# Altium PCB BluetoothModule.PcbDoc
Units mm, origin at the board's own origin, x right, y up, seen from the top; angles counter-clockwise.
Board outline 22 x 15 mm, 2 copper layers (Top Layer, Bottom Layer); 11 components, 11 nets, 67 pads, 11 vias.
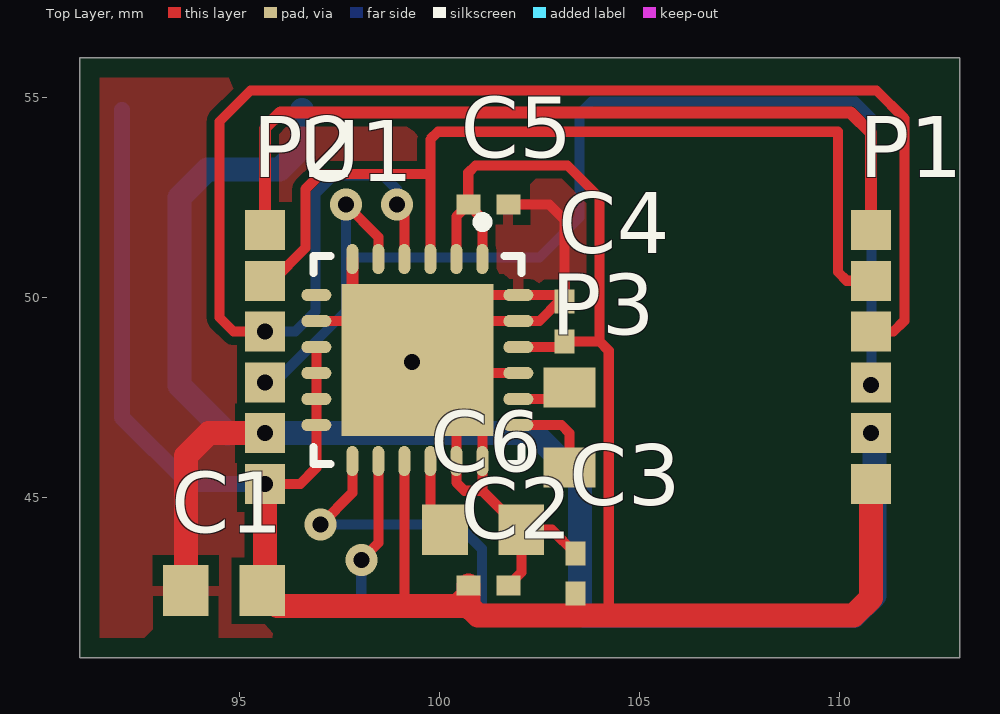
[diagram p0: Top Layer view]
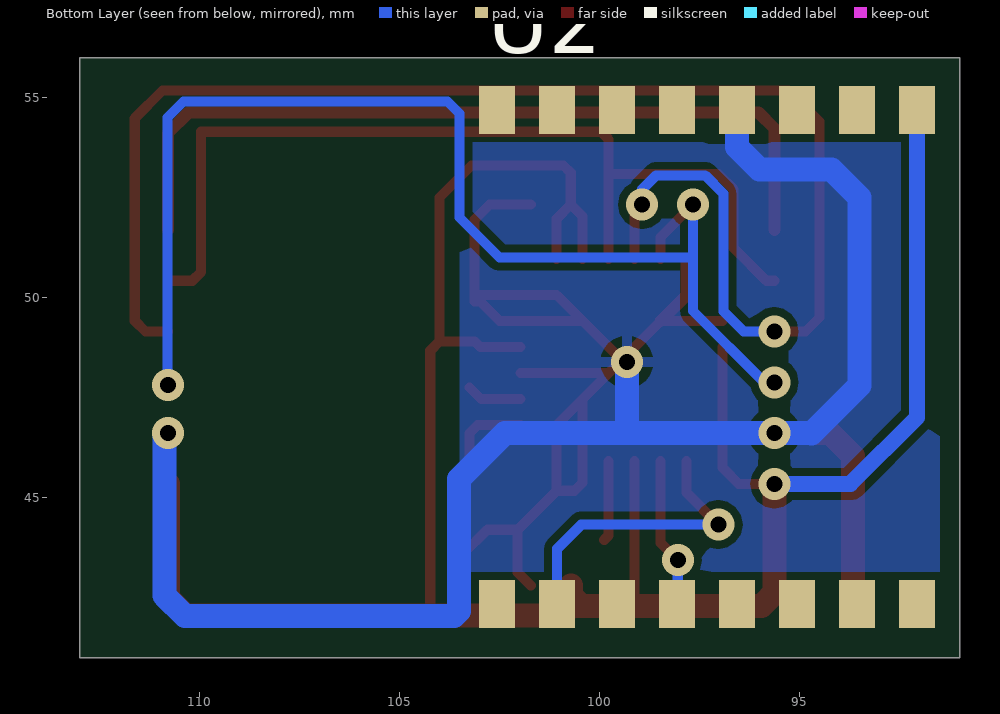
[diagram p1: Bottom Layer view, seen from below]

## Layer stack, top to bottom
Top Layer: signal copper 0.0356
Dielectric: dielectric 0.32, FR-4, Dk 4.8
Bottom Layer: signal copper 0.0356

## Board outline
91,56 112,56 113,56 113,41 91,41

## Design rules (kind name [scope] priority, off if disabled: settings)
Clearance [All] p1: gap=0.203
HoleToHoleClearance [All] p1: gap=0.203 allowstackedmicrovias=TRUE
MinimumSolderMaskSliver [All] p1: minsoldermaskwidth=0
PlaneClearance [All] p1: clearance=1
PlaneConnect [All] p1: planeconnectstyle=Direct reliefexpansion=0.508 reliefentries=4 reliefconductorwidth=0.254 reliefairgap=0.254
PolygonConnect [All] p1: connectstyle=Relief reliefconductorwidth=0.254 reliefentries=4 polygonreliefangle="90 Angle" airgapwidth=0.254
RoutingVias [All] p1: holewidth=0.4 width=0.8 viastyle="Through Hole" minholewidth=0.3 minwidth=0.6 maxholewidth=1 maxwidth=2
SilkToSilkClearance [All] p1: silktosilkclearance=0
SilkToSolderMaskClearance [IsPad] p1: minsilkscreentomaskgap=0 clearancetoexposedcopper=TRUE
SolderMaskExpansion [All] p1: expansion=0.051
Width [All] p1: maxlimit=2 minlimit=0.203 preferedwidth=0.3
22 further rules are at their usual default settings.

## Components (designator, comment, footprint, x,y, rotation, side; value= is the part's Value field where it differs from the comment)
C1 "10u" 0805 94.615,42.672 r0 top
C2 "Cap Semi" 0402 101.219,42.799 r180 top
C3 "Cap Semi" 0402 103.4,43.1 r270 top
C4 "Cap Semi" 0402 103.124,49.403 r270 top
C5 "Cap Semi" 0402 101.219,52.324 r180 top
C6 "10u" 0805 101.092,44.196 r180 top
P1 "OutputConn" Goldpin6_1.27mm 110.791,49.149 r0 top
P2 "InputConn" Goldpin6_1.27mm 95.631,49.149 r0 top
P3 "Programming" GeckoProgramming 103.251,47.752 r270 top
U1 "EFM32ZG110" QFN24_5x5_0.65 99.441,48.387 r270 top
U2 "HM-11" HM-11 97.409,48.614 r0 bottom

## Footprints (in the part's own frame and the unit in brackets; to place one, negate y for a bottom-side part, rotate by r counter-clockwise, add the part's x,y. Pads: shape width x height; smd on the part's side, far side on the other; paste and mask are expansions set on the pad)
0402 [mm] "Chip Capacitor, Body 1.0x0.5mm, IPC High Density"
  rect 0.6x0.5 smd: 1(-0.5,0) 2(0.5,0)
  body extent -0.55,-0.3 0.55,0.3, height 1.3
0805 [mm]
  rect 1.14x1.27 smd: 1(-0.955,0) 2(0.955,0)
GeckoProgramming [mm]
  rect 1x1.3 smd: 1(0,0) 2(2,0)
Goldpin6_1.27mm [mm]
  rect 1x1 smd: 1(0,-3.81) 2(0,-2.54) 3(0,-1.27) 4(0,0) 5(0,1.27) 6(0,2.54)
HM-11 [mm]
  rect 0.9x1.2 smd: 1(5.15,6.275) 2(3.65,6.275) 3(2.15,6.275) 4(0.65,6.275) 5(-0.85,6.275) 6(-2.35,6.275) 7(-3.85,6.275) 8(-5.35,6.275) 9(-5.35,-6.075) 10(-3.85,-6.075) 11(-2.35,-6.075) 12(-0.85,-6.075) 13(0.65,-6.075) 14(2.15,-6.075) 15(3.65,-6.075) 16(5.15,-6.075)
QFN24_5x5_0.65 [mm]
  oval 0.75x0.3 smd: 1(-2.575,1.631) 2(-2.575,0.981) 3(-2.575,0.331) 4(-2.575,-0.319) 5(-2.575,-0.969) 6(-2.575,-1.619) 13(2.475,-1.619) 14(2.475,-0.969) 15(2.475,-0.319) 16(2.475,0.331) 17(2.475,0.981) 18(2.475,1.631)
  oval 0.3x0.75 smd: 7(-1.675,-2.519) 8(-1.025,-2.519) 9(-0.375,-2.519) 10(0.275,-2.519) 11(0.925,-2.519) 12(1.575,-2.519) 19(1.575,2.531) 20(0.925,2.531) 21(0.275,2.531) 22(-0.375,2.531) 23(-1.025,2.531) 24(-1.675,2.531)
  rect 3.8x3.8 smd: 25(-0.05,0.006)
  silkscreen extent -3.62,-2.59 2.55,2.61, body extent -2.63,-2.57 2.53,2.58, height 1

## Part data
C1 C6: library part "Cap Semi", "Capacitor (Semiconductor SIM Model)"
C2 C3 C4 C5: "Capacitor (Semiconductor SIM Model)"
P1 P2: library part MHDR1X6, "Header, 6-Pin"
P3: library part MHDR1X2, "Header, 2-Pin"

## Via types
v1: diameter 0.8, hole 0.4, Top Layer to Bottom Layer, 11 vias

## Nets (pads, with @x,y where several pads share a name; then routed paths per layer and width w, separated by ;. In a path a pad name is that pad's centre, name@x,y a point inside that pad or via, vN(x,y) a via of type N, cw(c..) or ccw(c..) an arc to the next point about the centre after c; other vN are vias at no path point)
+5V: P1.6 P2.6 | length 20.5
  Top Layer w0.3: P2.6 95.631,54.231 96.025,54.625 110.275,54.625 110.791,54.109 P1.6
GND: C1.1 C2.1 C3.1 C4.1 C5.1 C6.1 P1.2 P2.2 U1.6 U1.8 U1.17 U1.18 U1.21 U1.23 U1.24 U1.25 U2.12 | length 71.8
  Top Layer w0.254: U1.8 98.472,49.412 U1.25 ; C2.1 102.047,43.127 C6.1 ; C5.1 102.743,52.324 103.124,51.943 C4.1 ; U1.21 U1.25@99.772,48.112 ; C3.1 102.804,44.196 C6.1 ; U1.25 U1.25@100.422,49.412 ; U1.25 U1.25@99.772,48.112 ; U1.25@99.772,48.112 U1.25@100.422,47.462 ; U1.25@100.422,47.462 101.072,46.812 U1.18 101.072,45.171 ; U1.25@100.422,47.462 U1.17 100.422,45.374 100.625,45.171 101.072,45.171 ; U1.25@100.422,49.412 101.072,50.062 U1.24 102.965,50.062 C4.1 ; U1.25@100.422,49.412 U1.23 102.498,49.412 102.989,49.903 C4.1 ; 101.072,45.171 C6.1
  Top Layer w0.3: U1.6 97.822,50.062 U1.25@98.472,49.412
  Top Layer w0.6: C1.1 93.66,46.035 94.234,46.609 v1(95.631,46.609)
  Bottom Layer w0.6: U2.12 96.559,53.759 96,53.2 94.2,53.2 93.5,52.5 93.5,47.8 94.7,46.6 94.709,46.609 v1(95.631,46.609) 99.314,46.609 ; v1(99.314,48.387) 99.314,46.609 ; v1(110.791,46.609) 110.871,46.609 110.871,42.545 110.363,42.037 103.639,42.037 103.512,42.164 103.512,45.459 102.362,46.609 99.314,46.609
MODCONND0: P1.5 P2.5 U1.3 | length 23.8
  Top Layer w0.254: P2.5 95.828,50.419 96.647,51.238 96.647,52.705 97.028,53.086 99.772,53.086 ; U1.3 99.772,53.086 ; P1.5 110.181,50.419 109.961,50.639 109.961,54.145 99.964,54.145 99.772,53.953 99.772,53.086
MODCONND1: P1.4 P2.4 U1.4 | length 39
  Top Layer w0.254: v1(95.631,49.149) 94.851,49.149 94.5,49.5 94.5,54.4 95.275,55.175 110.925,55.175 111.621,54.479 111.621,49.421 111.349,49.149 P1.4 ; v1(98.933,52.324) 98.933,52.451 99.122,52.262 U1.4
  Bottom Layer w0.254: v1(95.631,49.149) 96.393,49.149 96.901,49.657 96.901,52.595 97.361,53.054 98.584,53.054 98.933,52.705 v1(98.933,52.324) 98.933,52.502 v1@98.882,52.451
MODCONND2: P1.3 P2.3 U1.5 | length 30.4
  Top Layer w0.254: v1(97.663,52.324) 98.472,51.515 U1.5 ; v1(110.791,47.809) P1.3
  Bottom Layer w0.254: v1(95.631,47.879) 95.879,47.879 97.663,49.663 97.663,51 ; v1(97.663,52.324) 97.663,51 ; v1(110.791,47.809) 110.8,47.8 110.8,54.5 110.4,54.9 103.8,54.9 103.5,54.6 103.5,52 102.5,51 97.663,51
NetC6_2: C6.2 U1.16 | length 2
  Top Layer w0.254: U1.16 99.772,44.053 C6.2@99.883,43.942
NetP3_1: P3.1 U1.20 | length 1.4
  Top Layer w0.254: U1.20 102.961,47.462 P3.1
NetP3_2: P3.2 U1.19 | length 2.2
  Top Layer w0.254: U1.19 103.048,46.812 103.251,46.609 P3.2
UART_RX: U1.13 U2.2 | length 7.6
  Top Layer w0.254: v1(97.028,44.323) 97.822,45.117 U1.13
  Bottom Layer w0.254: v1(97.028,44.323) 100.457,44.323 101.059,43.721 U2.2
UART_TX: U1.14 U2.4 | length 3.8
  Top Layer w0.254: v1(98.044,43.434) 98.472,43.862 U1.14
  Bottom Layer w0.254: v1(98.044,43.434) 98.044,42.354 U2.4
VCC: C1.2 C2.2 C3.2 C4.2 C5.2 P1.1 P2.1 U1.1 U1.2 U1.9 U1.10 U1.11 U1.12 U1.15 U1.22 U2.9 | length 63.2
  Top Layer w0.254: v1(95.631,45.339) 96.52,45.339 96.922,45.741 U1.12 U1.11 U1.10 U1.9 ; 99.122,42.291 U1.15 ; 100.211,42.291 C2.2 ; U1.2 100.422,52.027 C5.2 ; U1.1 101.072,51.971 C5.2 ; U1.22 102.983,48.762 C4.2 104,48.903 ; 103.4,42.046 C3.2 ; 104.3,42.046 104.231,42.115 104.231,48.672 104,48.903 ; C5.2 100.719,53.119 100.9,53.3 103.2,53.3 104,52.5 104,48.903
  Top Layer w0.6: v1(95.631,45.339) 95.631,42.733 C1.2 95.951,42.291 99.122,42.291 100.211,42.291 100.719,42.291 ; C2.2 100.719,42.291 ; P1.1 110.791,42.483 110.354,42.046 104.3,42.046 103.4,42.046 100.964,42.046 100.719,42.291
  Bottom Layer w0.4: U2.9 92.059,47.006 93.726,45.339 v1(95.631,45.339)
pads on no net: U1.7 U2.1 U2.3 U2.5 U2.6 U2.7 U2.8 U2.10 U2.11 U2.13 U2.14 U2.15 U2.16

## Polygon pours and split planes (outlines as drawn)
GND on Bottom Layer "Top Layer-No Net" (solid, pour order 2): 91.5,55.5 103.5,55.5 103.5,41.5 91.5,41.5
GND on Top Layer "Top Layer-No Net" (solid, pour order 6): 91.5,55.5 103.5,55.5 104,55 104,41.5 91.5,41.5

## Dimensions
113,56 to 113,41 on Mechanical 1
91,56.1 to 113,56 on Mechanical 1